# Altium PCB 新核心板PCB1.PcbDoc (part 3 of 3)
Units mil, origin at the board's own origin, x right, y up, seen from the top; angles counter-clockwise.
Board outline 5840.03 x 4550.03 mil, 2 copper layers (Top Layer, Bottom Layer); 116 components, 170 nets, 698 pads, 423 vias.
Unrouted connection lines stored in the file: 1.
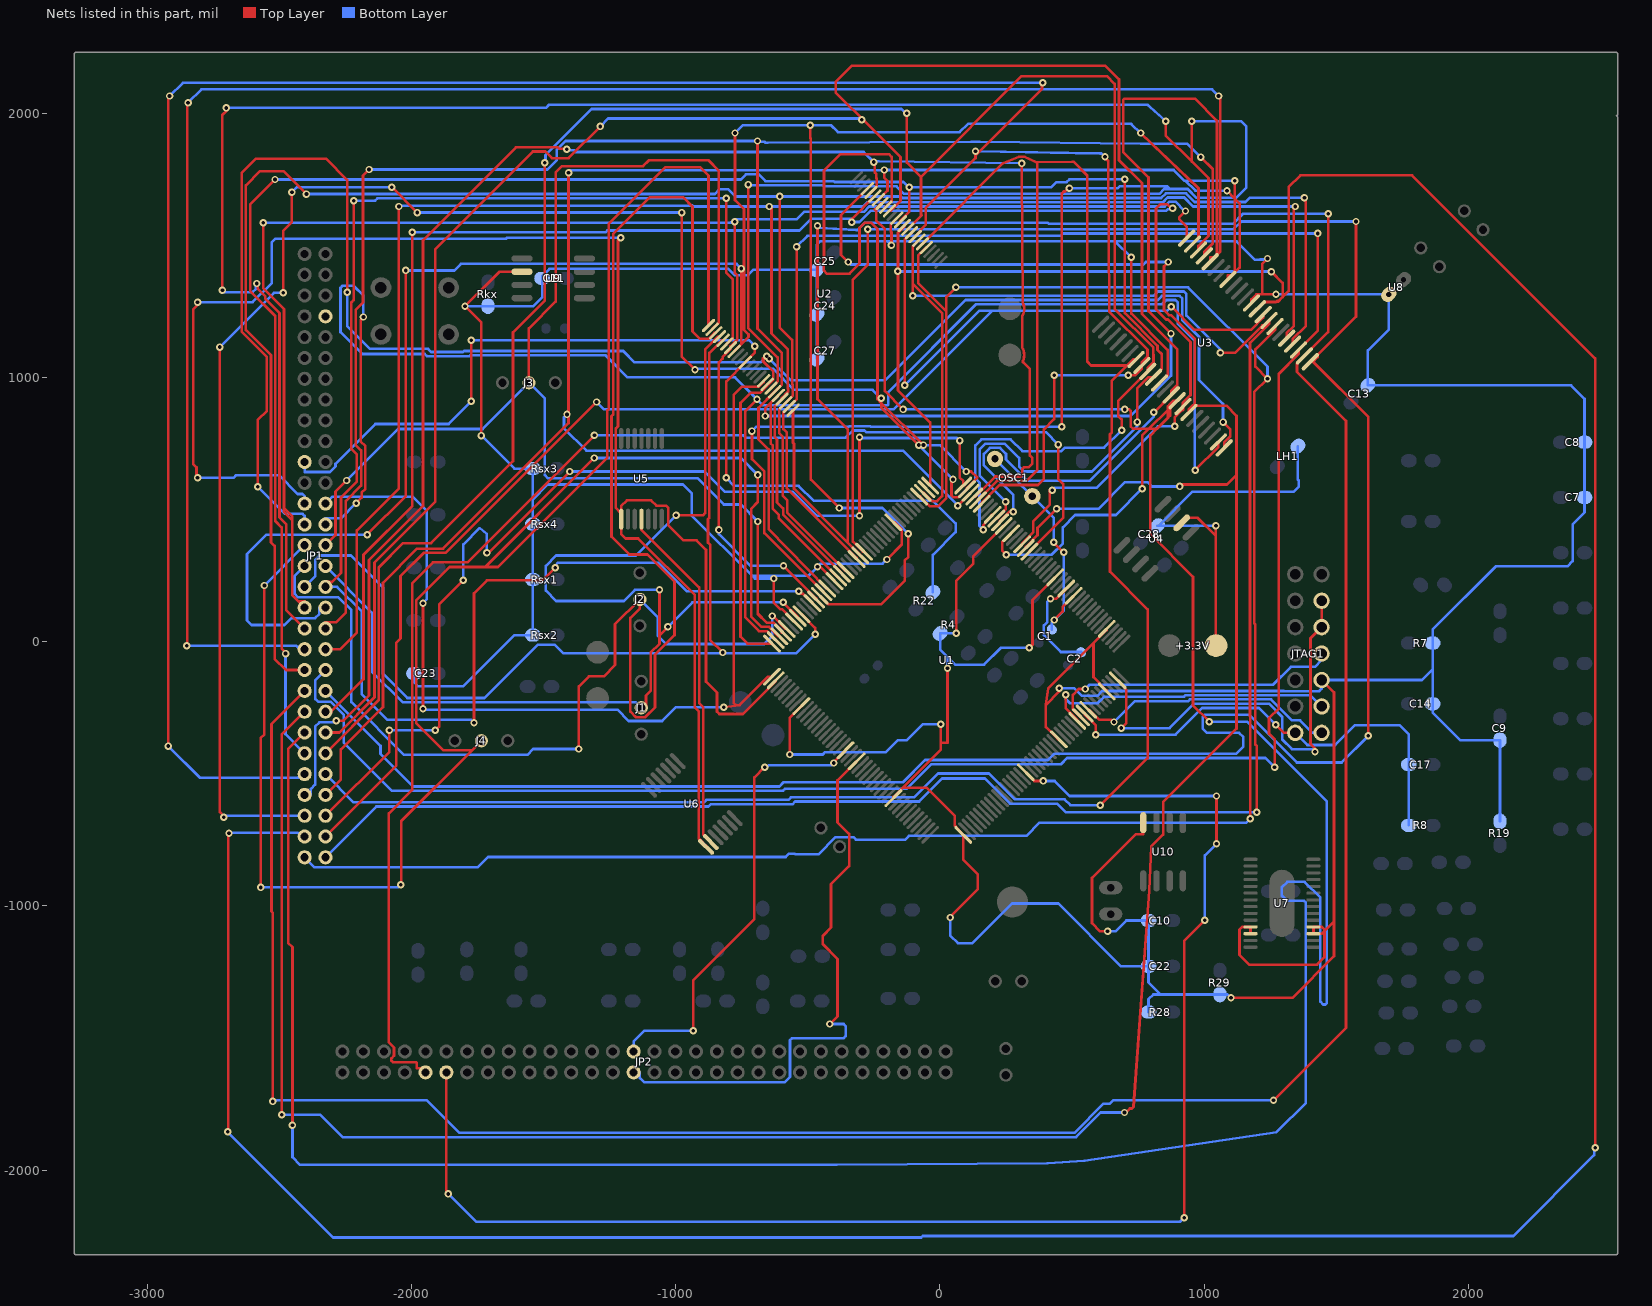
[diagram p3: the nets of this part, all layers, seen from the top]

## Via types
v1: diameter 28, hole 14, Top Layer to Bottom Layer, 422 vias
v2: diameter 50, hole 28, Top Layer to Bottom Layer, 1 vias

## Nets (pads, with @x,y where several pads share a name; then routed paths per layer and width w, separated by ;. In a path a pad name is that pad's centre, name@x,y a point inside that pad or via, vN(x,y) a via of type N, cw(c..) or ccw(c..) an arc to the next point about the centre after c; other vN are vias at no path point) (continued)
TCK: JTAG1.9 JTAG1.11 U1.87 | length 1692.7
  Top Layer w10: U1.87@673.39,-146.5 675.47,-146.5 705,-182.04 705,-309 v1(687,-327) ; v1(1420,-416) 1420,-404 1403,-387 1403,13 JTAG1.9@1445,55 JTAG1.11@1445,155
  Bottom Layer w10: v1(687,-327) 869.21,-327 961.71,-234.5 1245.93,-234.5 1296,-284.58 1296,-370 1333,-407 1411,-407 v1(1420,-416)
TDI: JTAG1.3 U1.76 | length 1137.4
  Top Layer w10: v1(477,-201) 477,-252.41 520.28,-295.69 U1.76@520.28,-299.61
  Bottom Layer w10: v1(477,-201) 477,-217 493,-233 596.81,-233 620.81,-209 923.21,-209 929.71,-202.5 1277.7,-202.5 1278.2,-203 1403,-203 JTAG1.3@1445,-245
TDO: JTAG1.7 U1.77 | length 1119.1
  Top Layer w10: U1.77@534.19,-285.7 532.91,-285.7 503.37,-256.15 503.37,-201 525.37,-179 v1(550,-179)
  Bottom Layer w10: v1(550,-179) 566,-163 1261,-163 1329,-95 1420,-95 1445,-70 JTAG1.7@1445,-45
TMS: JTAG1.1 U1.79 | length 990
  Top Layer w10: U1.79@562.03,-257.86 565.96,-257.86 603.79,-295.69 650.93,-295.69 v1(659.35,-304.11)
  Bottom Layer w10: v1(659.35,-304.11) 737.46,-226 938.5,-226 946,-218.5 1253.5,-218.5 1333,-298 1364,-298 1411,-345 JTAG1.1@1445,-345
TRST*: C17.1 JTAG1.2 R8.1 U1.78 | length 1772
  Top Layer w10: U1.78@548.11,-271.78 548.11,-275.7 590.41,-318 v1(590.41,-352) ; v1(1271,-314) 1302,-345 JTAG1.2@1345,-345
  Bottom Layer w10: v1(590.41,-352) 892,-352 993,-251 1208,-251 v1(1271,-314) ; JTAG1.2@1345,-345 1391,-391 1496,-391 1571,-316 1740,-316 1775,-351 C17.1@1775,-465.24 R8.1@1775,-695.28
TXDB: JP2.50 U1.62 | length 5703.9
  Top Layer w10: JP2.50@-1867.36,-1630 -1868,-1630 -1868,-2077.13 -1860,-2085.13 v1(-1860,-2090) ; U1.62@325.4,-494.49 357.92,-527 v1(392,-527) ; v1(925,-2180) 925,-1132 v1(1003,-1054) ; v1(1047,-765) v1(1047,-584)
  Bottom Layer w10: v1(-1860,-2090) -1755,-2195 910,-2195 v1(925,-2180) ; v1(392,-527) 434.37,-527 491.37,-584 v1(1047,-584) ; v1(1003,-1054) 1003,-809 v1(1047,-765)
TXDC: JP2.52 U1.114 | length 5204
  Top Layer w10: JP2.52@-1946.1,-1630 -1946.1,-1615 -1979.51,-1615 -1979.51,-1593.9 -1982.41,-1591 -2069.9,-1591 -2075.76,-1585.14 -2075.76,-1576.86 -2065.81,-1566.91 -2065.81,-1535.61 -2085,-1516.42 -2085,-650 -1997,-562 -1997,221 -1918,300 -1788,300 v1(-1307,781) ; U1.114@339.32,340.68 467,468.36 467,596.82 448,615.82 v1(448,746)
  Bottom Layer w10: v1(-1307,781) -745,781 -736,772 -356,772 -329,799 -285,799 -279,793 401,793 v1(448,746)
TZ1N: JP2.31 U1.21 | length 1725.4
  Top Layer w10: v1(-933,-1473) -933,-1281 -702,-1050 -702,-514 v1(-663,-475) ; v1(-401,-459) -401,-455.32 U1.21@-356.65,-410.97
  Bottom Layer w10: JP2.31@-1158.7,-1551.26 -1158.7,-1513 -1118.7,-1473 v1(-933,-1473) ; v1(-663,-475) -654.7,-475 -647.7,-468 -410,-468 v1(-401,-459)
TZ2N: JP2.32 U1.24 | length 2205
  Top Layer w10: v1(-416,-1447) -387,-1418 -387,-1201 -443,-1145 -443,-1113 -411.76,-1081.76 -411.76,-917.76 -343,-849 -343,-727.86 -387,-683.86 -387,-524.84 U1.24@-314.89,-452.73
  Bottom Layer w10: JP2.32@-1158.7,-1630 -1135,-1630 -1135,-1651 -1118,-1668 -588,-1668 -567,-1647 -567,-1508 -560,-1501 -364,-1501 -356,-1493 -356,-1455 -364,-1447 v1(-416,-1447)
VCC: C7.1 C8.1 C9.1 C10.1 C11.1 C13.1 C14.1 C22.1 C23.1 C24.1 C25.1 C27.1 JTAG1.5 R4.1 R7.2 R19.1 R28.1 R29.1 Rkx.1 Rsx1.2 Rsx2.2 Rsx3.2 Rsx4.2 U1.9 U1.34 U1.45 U1.71 U1.84 U1.93 U1.107 U1.121 U1.143 U1.159 U1.170 U2.37 U3.11 U3.33 U7.11 U7.12 U7.17 U7.18 U8.1 U9.2 U10.8 | length 23386.8
  Top Layer w10: v1(-1735,780) -1735,1208 v1(-1797,1270) -1667,1400 U9.2@-1581.22,1400 ; v1(-628,239) -628,146.76 -604,122.76 -598.07,122.76 U1.170@-551.52,76.21 ; v1(-568,-427) -568,-288.26 U1.9@-523.68,-243.94 ; v1(-463,283) -452.08,283 U1.159@-398.41,229.32 ; v1(-200.15,311) -144,367.15 -144,424.26 -171.77,452.03 U1.143@-175.7,452.03 ; v1(-183,1500) -183,1550 -186,1553 -186,1579.68 U2.37@-162.84,1602.84 ; U1.34@-175.7,-591.92 -175.7,-588 -140.7,-553 ; v1(4,-312.4) 4,-383.16 ; v1(29.14,-101) 29.14,-383.16 4,-383.16 ; v1(40,-1044) 40,-1040 144,-936 144,-881 88.77,-825.77 U1.45@88.77,-731.12 87.87,-731.12 57,-695.41 57,-659 -49,-553 -140.7,-553 ; v1(62,31.36) 62,230.18 126.82,295 126.82,323.63 241.3,438.11 U1.121@241.89,438.11 ; v1(339,-23) 351,-11 351,157.48 U1.107@436.76,243.24 ; U1.71@450.68,-369.21 446.75,-369.21 401,-323.46 401,-240 ; v1(452,-176) 452,-189 401,-240 ; U1.84@631.63,-188.26 631.63,-184.33 581.77,-134.47 581.77,-5.42 ; U1.93@631.63,48.37 631.63,44.44 581.77,-5.42 ; v1(635,-1096) 607.05,-1096 576.05,-1065 576.05,-894.01 741.06,-729 770,-729 U10.8@770,-685 ; v1(725,1455) 725,1241.26 862,1104.26 862,1009.29 U3.33@831.36,978.64 ; v1(1102,-1348) 1334,-1348 1492,-1190 1492,-1059.16 ; U7.12@1176,-1105.16 U7.11@1176,-1079.57 1143.43,-1079.57 1134,-1089 1134,-1185 1171,-1222 1428,-1222 1456,-1194 1456,-1095.16 ; U3.11@1179.34,1282.09 1179.34,1295.34 1198.32,1314.32 1220.25,1314.32 ; v1(1240,1450) 1240,1448.48 1220.25,1428.73 1220.25,1314.32 ; v1(1272.32,1314.32) 1220.25,1314.32 ; JTAG1.5@1445,-145 1492,-192 1492,-1059.16 ; -140.7,-553 4,-408.3 4,-383.16 ; 401,-240 411,-176.19 581.77,-5.42 ; 1456,-1095.16 1492,-1059.16 ; 1456,-1095.16 1446,-1105.16 U7.17@1414,-1105.16 U7.18@1414,-1079.57 1446.57,-1079.57 1456,-1089 1456,-1095.16
  Bottom Layer w10: C23.1@-1990,-120.28 -1990,-153 -1974,-169 -1804,-169 -1610.21,24.79 Rsx2.2@-1540,24.79 Rsx1.2@-1540,234.86 Rsx4.2@-1540,444.93 -1540,539 ; v1(-1797,1270) Rkx.1@-1710,1270 -1538,1270 -1505,1303 C11.1@-1505,1375 -1505,1383.49 -1477.49,1411 -800,1411 -776,1387 -726,1387 -704.76,1408.24 C25.1@-464.8,1408.24 ; v1(-1735,780) -1610,655 Rsx3.2@-1540,655 -1540,539 ; v1(-628,239) -700,239 -711,250 ; v1(-568,-427) -443,-427 -434,-418 -204,-418 -159.69,-373.69 -125.69,-373.69 -64.4,-312.4 v1(4,-312.4) ; C27.1@-464.8,1069.8 C24.1@-464.8,1239.02 C25.1@-464.8,1408.24 ; v1(-200.15,311) -216.15,295 -451,295 v1(-463,283) -496,250 -711,250 ; v1(-183,1500) -198.33,1515.33 ; v1(29.14,-101) 29.14,-58.14 ; v1(40,-1044) 40,-1113 68,-1141 123,-1141 273,-991 448.72,-991 686.34,-1228.62 C22.1@790,-1228.62 ; v1(62,31.36) R4.1@1.36,31.36 1.36,-30.36 29.14,-58.14 ; v1(339,-23) 231,-23 167,-87 58,-87 29.14,-58.14 ; v1(452,-176) 508.62,-176 537.62,-205 596,-205 614.5,-186.5 1301.7,-186.5 1302.2,-187 1436,-187 1445,-178 JTAG1.5@1445,-145 1825,-145 1865,-105 ; v1(635,-1096) 665,-1096 705.72,-1055.28 C10.1@790,-1055.28 C22.1@790,-1228.62 ; v1(725,1455) 723.33,1455 663,1515.33 ; R28.1@790,-1401.95 790,-1353 808,-1335 836,-1335 ; v1(1102,-1348) 1089,-1335 R29.1@1060,-1335 836,-1335 ; v1(1240,1450) 1236.56,1446.56 1211.69,1446.56 1210.13,1445 1193,1445 1122.67,1515.33 663,1515.33 ; v1(1272.32,1314.32) U8.1@1699.32,1314.32 1699.32,1181.52 1619.8,1102 C13.1@1619.8,970.2 2388.8,970.2 2440,919 C8.1@2440,755 C7.1@2440,545.71 2440,489 2395,444 2395,305 2375,285 2104,285 1865,46 R7.2@1865,-5.14 1865,-105 ; R19.1@2120,-680 C9.1@2120,-372.5 1969.5,-372.5 1865,-268 C14.1@1865,-235.19 1865,-105 ; -1540,539 -1484,595 -972,595 -939,562 -939,478 -711,250 ; C25.1@-464.8,1408.24 -464.8,1503.2 -452.67,1515.33 -198.33,1515.33 ; -198.33,1515.33 -183,1515.33 663,1515.33 ; C22.1@790,-1228.62 790,-1289 836,-1335
VDD: +3.3V.A C28.1 LH1.1 U4.2 | length 1578.5
  Top Layer w10: U4.2@915.36,449.64 934.71,469 976,469 1045,400 ; +3.3V.A@1045,-5 1045,400 ; v1(1045,438.64) 1045,400
  Bottom Layer w10: C28.1@823.64,438.64 C28.1@827,438.64 ; v1(1045,438.64) C28.1@827,438.64 ; LH1.1@1355,740 1355,614 1358,611 1358,586 1339,567 955.36,567 C28.1@827,438.64
WR: JP1.40 R22.2 U2.11 | length 3878
  Top Layer w10: v1(-1773,910) v1(-1773,1141) ; v1(-808,620) -808,985.52 U2.11@-736.32,1057.2 -700,1093.52 v1(-700,1118)
  Bottom Layer w10: JP1.40@-2403.74,679.96 -2403.74,642 -2308.23,642 -2287.23,663 -2287.23,672.77 -2136,824 -1859,824 v1(-1773,910) ; v1(-1773,1141) -723,1141 v1(-700,1118) ; v1(-808,620) -778,590 -534,590 -477,533 -25,533 60,448 60,414.59 -26.23,328.36 R22.2@-26.23,186.69
X1: C2.2 U1.104 | length 392.5
  Top Layer w10: v1(419,162) 440.32,162 478.52,200.2 U1.104@478.52,201.48
  Bottom Layer w10: v1(419,162) 406.33,149.33 406.33,73.33 394,61 394,25 458,-39 535.06,-39 C2.2@535.06,-39.94
X2: C1.2 OSC1.1 OSC1.2 U1.102 | length 907.3
  Top Layer w10: v1(431,376) v1(469,338) ; v1(433,82) 464.84,113.84 464.84,132.12 U1.102@506.36,173.64
  Bottom Layer w10: OSC1.2@208.78,691.62 311.05,589.35 311.05,588.57 349.42,550.2 OSC1.1@350.2,550.2 431,469.4 v1(431,376) ; C1.2@424.33,46.33 v1@424.33,72.33 ; v1(433,82) 424.33,73.33 v1@424.33,72.33 ; v1(469,338) 469,117 v1@424.33,72.33
XA0: JP1.17 U1.151 U3.1 | length 9932.8
  Top Layer w10: U1.151@-287.05,340.68 -290.98,340.68 -329,378.7 -329,1370 -273,1426 v1(-273,1561) ; U3.1@1402.05,1059.38 1412.38,1059.38 ; v1(1575,1590) 1575,1230.13 1430,1085.13 1430,1077 1412.38,1059.38 ; v1(1622,-356) 1622,849.75 1412.38,1059.38
  Bottom Layer w10: JP1.17@-2325,-186.18 -2116.66,-394.52 -2116.66,-425 -1993.66,-548 -607.2,-548 -591.2,-532 -140.18,-532 -56.17,-448 409.03,-448 432.7,-424.34 1121.66,-424.34 1149,-397 1149,-361 1133,-345 1011,-345 995,-329 995,-285 1004,-276 1170,-276 1351,-457 1521,-457 v1(1622,-356) ; v1(-273,1561) 1112.01,1561 1141.01,1590 v1(1575,1590)
XA1: JP1.18 U1.152 U2.24 U3.2 | length 12964.4
  Top Layer w10: v1(-2525,-1740) -2525,-1025.28 -2529,-1021.28 -2529,-311.44 JP1.18@-2403.74,-186.18 ; U2.24@-555.37,876.25 -555.37,752 -552,748.63 -552,579.07 -349,376.07 ; v1(-463,1574) -463,918 -349,804 -349,376.07 ; U1.152@-300.97,326.76 -300.97,328.04 -349,376.07 ; v1(1263,-1736) 1537.41,-1461.59 1537.41,835.59 1352,1021 1352,1053.87 U3.2@1379.78,1081.65 1405.53,1107.4 1470,1171.87 v1(1470,1620)
  Bottom Layer w10: v1(-2525,-1740) -2521.56,-1736.56 -2510.7,-1736.56 -2510.14,-1736 -1941.47,-1736 -1818.47,-1859 509.2,-1859 619.83,-1748.37 643.81,-1748.37 656.18,-1736 v1(1263,-1736) ; v1(-463,1574) -463,1566.99 -316.3,1558.02 -315.69,1558 -311.36,1558 -283.36,1586 408.19,1586 413.19,1581 1109.39,1581 1148.39,1620 v1(1470,1620)
XA2: JP1.19 U1.153 U2.23 U3.3 | length 9441.7
  Top Layer w10: v1(-542,1495) -542,989.82 -541.1,988.93 -541.1,918.35 U2.23@-569.29,890.17 -592,867.45 -592,805.01 -578.65,791.66 -578.65,580.52 -314.89,316.77 U1.153@-314.89,312.84 ; v1(1267,-474.85) 1267,-369 1246,-348 1246,-289 1283,-252 1283,1014 1357.51,1088.51 U3.3@1357.51,1103.92 1430,1176.41 v1(1430,1545)
  Bottom Layer w10: JP1.19@-2325,-107.44 -2363,-145.44 -2363,-217 -2352.85,-227.15 -2306.66,-227.15 -2255.43,-278.38 -2255.43,-383.04 -2074.47,-564 -592.92,-564 -585.92,-557.01 -125.51,-557.01 -32.5,-464 457.75,-464 481.41,-440.34 1232.49,-440.34 v1(1267,-474.85) ; v1(-542,1495) -501,1536 457.56,1536 466.56,1545 v1(1430,1545)
XA3: JP1.20 U1.156 U2.22 U3.4 | length 8219.7
  Top Layer w10: JP1.20@-2403.74,-107.44 -2474.56,-107.44 -2517,-65 -2517,362 -2531,376 -2531,1084.61 -2626,1179.61 -2626,1727 -2572,1781 -2484,1781 v1(-2397,1694) ; v1(-606,1685) -606,1188.85 -559,1141.85 -559,974.82 -557.1,972.93 -557.1,930.19 U2.22@-583.21,904.08 -608,879.29 -608,789.01 -594.65,775.66 -594.65,552.65 -577,535 -577,487.51 -360.57,271.08 U1.156@-356.65,271.08 ; U3.4@1335.24,1126.19 1335.24,1145.43 1385,1195.19 1385,1665.14 1383.44,1666.7 1383.44,1676.56 v1(1380,1680)
  Bottom Layer w10: v1(-2397,1694) -851.15,1694 -832.85,1712.3 -801.15,1712.3 -773.85,1685 -147.63,1685 -141.63,1679 837.63,1679 855.63,1697 931.75,1697 964.75,1664 1156.5,1664 1172.5,1680 v1(1380,1680)
XA4: JP1.21 U1.157 U2.21 U3.5 | length 7599.8
  Top Layer w10: JP1.21@-2325,-28.7 -2269.7,-28.7 -2206.5,34.5 -2206.5,420.5 -2047,580 v1(-2047,1647) ; v1(-646,1647) -637,1638 -637,1167 -575,1105 -575,957 -574,956 -574,945.91 -597.13,922.79 U2.21@-597.13,918 -624,891.13 -624,773.01 -616,765.01 -616,527 -593,504 -593,480.88 -370.57,258.45 U1.157@-370.57,257.16 ; U3.5@1312.97,1148.46 1312.97,1167.7 1340,1194.73 1340,1642 v1(1345,1647)
  Bottom Layer w10: v1(-2047,1647) -2044.79,1649.21 -939.41,1649.21 -937.2,1647 v1(-646,1647) ; -937.2,1652 -932.2,1647 -651,1647 -646,1652 -641,1647 -290.24,1647 -274.24,1663 844.25,1663 862.25,1681 925.12,1681 959.12,1647 v1(1345,1647)
XA5: JP1.22 U1.158 U2.20 U3.18 | length 11598
  Top Layer w10: v1(-2850,-15) -2847.5,-12.5 -2847.5,2037.5 v1(-2845,2040) ; v1(-661,854) -661,881.97 -640,902.97 ; U2.20@-611.04,931.92 -640,902.97 ; U1.158@-384.49,243.24 -385.51,243.24 -609,466.74 -609,480 -632,503 -632,742 -640,750 -640,902.97 ; v1(875,1166) 790,1251 790,1757 694,1853 694,2049.14 699.86,2055 965,2055 1049,1971 U3.18@1049,1464 ; U3.18@1039,1454 1023.44,1454 U3.18@1023.44,1437.99 1039.23,1453.77 1049.23,1463.77 1062,1476.54 1062,2053.13 1055,2060.13 v1(1055,2065)
  Bottom Layer w10: v1(-2850,-15) -2436.37,-15 -2431,-20.37 -2412.07,-20.37 JP1.22@-2403.74,-28.7 ; v1(-2845,2040) -2795,2090 1030,2090 v1(1055,2065) ; v1(-661,854) 722,854 875,1007 v1(875,1166)
XA6: JP1.23 U1.161 U2.19 U3.19 | length 7366.7
  Top Layer w10: JP1.23@-2325,50.04 -2325,74 -2284,74 -2248,110 -2248,532.84 -2190,590.84 -2190,724 -2211,745 -2211,1256 -2183,1284 -2183,1764 v1(-2160,1787) ; v1(-690,1895) -690,1184.5 -597.87,1092.37 -597.87,972.94 U2.19@-624.96,945.84 -686,884.81 -686,766 -648,728 -648,427.17 -428.32,201.48 U1.161@-426.24,201.48 ; v1(987,1834) 1033,1788 1033,1507.83 1001.17,1476 U3.19@1001.17,1460.26
  Bottom Layer w10: v1(-2160,1787) -1484.64,1787 -1450.18,1821.47 -1450.18,1860.53 -1415.71,1895 v1(-690,1895) -686.56,1891.56 -663.56,1891.56 -659.93,1887.93 -651.64,1887.93 120.09,1892 149.85,1892 cw(c149.85,1882) 150.02,1892 760.03,1884.71 760.22,1884.71 ccw(c760,1896.81) 762.66,1885 936,1885 938.93,1882.07 943.93,1877.07 v1(987,1834)
XA7: JP1.24 U1.162 U2.18 U3.20 | length 12961.9
  Top Layer w10: v1@-2715,1328.53 -2715,1994.18 -2700,2009.18 v1(-2700,2020) ; v1(-2585,1355.42) -2581.56,1351.98 -2581.56,1335.93 -2553,1307.37 -2553,1298 -2499,1244 -2499,470 -2473.51,444.51 -2473.51,119.81 JP1.24@-2403.74,50.04 ; v1(-725,1730) -725,1186.87 -613.87,1075.74 -613.87,985.2 -638.88,960.19 U2.18@-638.88,959.76 ; v1(-711,797) -711,691 -664,644 -664,411.4 U1.162@-440.16,187.56 ; v1(462,813) 462,1696.87 469.07,1703.94 473.28,1703.94 485.71,1716.37 v1(490.58,1716.37) ; v1(855,1970) 855,1916 953.54,1817.46 ; v1(953.54,1970) 953.54,1817.46 ; U3.20@978.9,1482.53 978.9,1498 1017,1536.1 1017,1754 953.54,1817.46
  Bottom Layer w10: v1@-2715,1328.53 -2709.14,1322.67 -2600.33,1322.67 -2588.44,1334.56 -2588.44,1351.98 v1(-2585,1355.42) ; v1(-2700,2020) -1490.3,2020 -1478.3,2032 786.93,2032 793.22,2025.7 793.6,2025.35 796.26,2022.95 v1(855,1970) ; v1(-725,1730) -722,1727 -442.06,1727 -438.46,1723.4 -163.4,1723.4 -135,1695 831,1695 849,1713 871,1713 ; v1(-711,797) -695,813 -345,813 -343,815 -263,815 -261,813 v1(462,813) ; v1(490.58,1716.37) 673.91,1716.37 681.54,1724 860,1724 871,1713 ; v1(953.54,1970) 1140,1970 1160,1950 1160,1719 1121,1680 971.37,1680 938.37,1713 871,1713
  other v1: -2715,1330
XA8: JP1.25 U1.163 U2.8 U3.21 | length 9044.8
  Top Layer w10: v1(-2167,405) -2021,551 v1(-2021,1405) ; U2.8@-778.08,1098.96 -751,1126.03 ; v1(-775,1925) -775,1671.1 -741,1637.1 -741,1412 -741,1180.24 -724,1163.24 -724,1153.03 -751,1126.03 ; v1(-751,1412) -751,1126.03 ; v1(-490,1955) -490,1905.92 -488,1903.92 -488,614 v1(-380,506) ; U1.163@-454.08,173.65 -422.44,142 -221,142 -133,230 -133,307 -119,321 v1(-119,408) ; v1(760,1925) 979,1716 979,1527.17 U3.21@956.63,1504.8
  Bottom Layer w10: JP1.25@-2325,128.78 -2348,128.78 -2348,105 -2364,89 -2454,89 -2480,63 -2604,63 -2622,81 -2622,331 -2548,405 v1(-2167,405) ; v1(-2021,1405) -1837,1405 -1812,1430 -769,1430 v1(-751,1412) ; v1(-775,1925) -746,1954 -491,1954 v1(-490,1955) -412.73,1955 -385.73,1928 75.17,1928 107.17,1960 723.34,1960 726.24,1957.23 v1(760,1925) ; v1(-380,506) -217,506 v1(-119,408)
XA9: JP1.26 U1.164 U2.7 U3.22 | length 7023.8
  Top Layer w10: v1(-2560,1585) -2560,1337 -2482,1259 -2482,506 ; -2451,176 -2427,152 ; v1(-836,423) -836,1057.04 -822,1071.04 -822,1078.09 -792,1108.09 U2.7@-792,1112.88 -792,1117.66 -767,1142.66 -767,1387 -776,1396 v1(-776,1589) ; v1(-591.35,287) -468,163.65 U1.164@-468,159.73 ; v1(930,1630) 906.64,1606.64 906.64,1598.36 934.36,1570.64 U3.22@934.36,1527.07 ; -2482,506 -2482,491 -2451,460 ; -2482,506 -2451,475 -2451,460 ; -2451,460 -2451,176.04 -2426.96,152 ; -2426.96,152 JP1.26@-2403.74,128.78 -2403.74,152 -2426.96,152
  Bottom Layer w10: v1(-2560,1585) -790,1585 -776,1599 -541.15,1599 -513.15,1627 -287.61,1627 -267.61,1647 850.88,1647 868.88,1665 891.36,1665 926.36,1630 v1(930,1630) ; v1(-836,423) -836,407 -716,287 v1(-591.35,287) ; -790,1587 -778,1587 v1(-776,1589)
XA10: JP1.27 U1.165 U2.6 | length 6368.8
  Top Layer w10: JP1.27@-2325,207.52 -2325,226 -2300,226 -2266,260 -2266,546 -2206,606 -2206,708 -2227,729 -2227,1284 -2218,1293 v1(-2218,1669) ; v1(-1763,-307) -1763,183 -1714,232 -1503,232 v1(-1455,280) ; v1(-808,1677.93) -808,1396 -783,1371 -783,1149.71 U2.6@-805.92,1126.79 ; v1(-534,191) -524,181 -517.12,181 U1.165@-481.92,145.81
  Bottom Layer w10: JP1.27@-2325,207.52 -2280.52,207.52 -2187,114 -2187,-199 -2090.08,-295.92 -1774.08,-295.92 v1(-1763,-307) ; v1(-2218,1669) -2137,1669 -2128.07,1677.93 v1(-808,1677.93) ; v1(-1455,280) -1455,289 -1445,299 -1066,299 -958,191 v1(-534,191)
XA11: JP1.28 U1.168 U2.5 | length 3891.3
  Top Layer w10: v1(-821,-41) -869,7 -869,367 -877,375 -877,464 -872,469 -872,1093.33 -824.62,1140.71 U2.5@-819.84,1140.71 ; U1.168@-523.68,104.05 -471.63,52 v1(-471.63,28)
  Bottom Layer w10: JP1.28@-2403.74,207.52 -2364,247.26 -2364,310 -2348,326 -2229,326 -2107.25,204.25 -2107.25,-120.94 -2015.19,-213 -1723,-213 -1522,-12 -1457,-12 -1425,-44 v1@-824,-44 ; v1(-821,-41) v1@-824,-44 ; v1(-471.63,28) -543.63,-44 v1@-824,-44
XA12: J1.2 JP1.29 U1.169 U2.4 | length 4571.2
  Top Layer w10: J1.2@-1130,-250 -1112,-250 -1112,-204 -1094,-186 -1094,-41 -1061,-8 -1061,24 ; v1(-1061,196) -1061,24 ; v1(-1029,56) -1061,24 ; v1(-998,478) -897,478 -888,487 -888,1105.17 -838.54,1154.63 U2.4@-833.75,1154.63 ; v1(-592.54,149) -537.6,94.06 U1.169@-537.6,90.13
  Bottom Layer w10: JP1.29@-2325,286.26 -2148,109.26 -2148,-114 -2033,-229 -1151,-229 J1.2@-1130,-250 ; v1(-1061,196) -1154,196 -1196,154 -1452,154 -1491,193 -1491,287 -1452,326 -1150,326 v1(-998,478) ; v1(-1029,56) -936,149 v1(-592.54,149)
XA13: J2.2 JP1.30 U1.172 U2.3 | length 6606.3
  Top Layer w10: v1(-1366,-406) -1366,-169 -1327.9,-130.9 -1271.66,-130.9 -1229,-88.24 -1229,66 J2.2@-1135,160 -1135,126 -1171,90 -1171,-265 -1150,-286 -1115,-286 -1078,-249 -1078,-49 -1004,25 -1004,228 -1106,330 -1175,330 -1242.2,397.2 -1242.2,854.28 -1236.48,860 -1236.48,1543 -1097.48,1682 -972,1682 -936,1646 -936,1174 -908,1146 -875.01,1146 -852.46,1168.55 U2.3@-847.67,1168.55 ; v1(-634,97) -631.91,97 -583.28,48.37 U1.172@-579.36,48.37
  Bottom Layer w10: JP1.30@-2403.74,286.26 -2442,248 -2442,182 -2428,168 -2276,168 -2227,119 -2227,-229 -2028,-428 -1561,-428 -1539,-406 v1(-1366,-406) ; J2.2@-1135,160 -1068,93 -1068,23 -1036,-9 -665,-9 -634,22 v1(-634,97)
XA14: J3.2 JP1.31 U1.173 U2.2 | length 4953.8
  Top Layer w10: JP1.31@-2325,365 -2287,403 -2287,568 v1(-2245,610) ; J3.2@-1555,980 -1555,1186 -1454,1287 -1454,1775.73 -1430,1799.73 -1123.27,1799.73 -1101,1822 -876,1822 -836,1782 -836,1208.07 U2.2@-861.59,1182.47 ; v1(-689,455) -689,105.7 -655.3,72 -629.54,72 -597.2,39.66 -597.2,34.45 U1.173@-593.28,34.45
  Bottom Layer w10: v1(-2245,610) -2050,805 -1730,805 J3.2@-1555,980 -1495,920 -1495,630 -1484,619 -917,619 -817.13,519.13 -753.13,519.13 v1(-689,455)
XA15: J4.2 JP1.32 U1.174 U2.1 | length 8082.6
  Top Layer w10: v1(-2570,-930) -2570,-364.38 -2556,-350.38 v1(-2556,212.74) ; v1@-2038.18,-920.36 -2038.18,-678.18 -1771,-411 ; J4.2@-1735,-375 -1771,-411 ; v1(-1308.03,695) -1720.24,282.79 ; U2.1@-875.51,1196.39 -875.51,1763.51 -908,1796 -1038.34,1796 -1252.48,1581.86 -1252.48,881.22 -1258.2,875.5 -1258.2,696.89 -1672.31,282.79 -1720.24,282.79 ; v1(-689,631) -689,528 -714,503 -714,95 -675,56 -646.59,56 -611.12,20.53 U1.174@-607.2,20.53 ; -1771,-411 -1879,-411 -1981,-309 -1981,156.97 -1855.18,282.79 -1720.24,282.79
  Bottom Layer w10: v1(-2570,-930) -2050.91,-930 v1@-2038.18,-917.27 ; v1(-2556,212.74) JP1.32@-2403.74,365 ; v1(-1308.03,695) -753,695 v1(-689,631)
  other v1: -2040,-920
XA16: JP1.33 U1.175 U3.43 | length 6530.8
  Top Layer w10: v1(-2209,524) -2188,545 -2188,564 -2174,578 -2174,740 -2192.11,758.11 -2192.11,1217.89 v1(-2181.37,1228.63) ; v1@-691.5,917.5 v1(-692,917) -736,873 -736,92 -684,40 -654.5,40 U1.175@-621.12,6.61 ; v1(966.37,649) 1054.07,736.7 U3.43@1054.07,755.93
  Bottom Layer w10: JP1.33@-2325,443.74 -2325,467 -2266,467 v1(-2209,524) ; v1(-2181.37,1228.63) -2181.37,1310.37 -2218,1347 -2260,1347 -2268,1339 -2268,1171.45 -2185.06,1088.51 -1949.51,1088.51 -1941.46,1080.46 -1780.26,1080.46 -1776.72,1084 -1265.8,1084 -1182.33,1000.53 -774.53,1000.53 v1@-691.5,917.5 ; v1(-692,917) -670.21,895.21 -196.94,895.21 -195.75,896.4 -195.75,943.89 137.36,1277 841,1277 857,1293 892,1293 901,1284 901,1202.61 965,1138.61 965,650.37 v1(966.37,649)
XA17: JP1.34 U1.176 U2.17 U3.44 | length 7866.8
  Top Layer w10: v1(-2581,586) -2581,839.92 -2547,873.92 -2547,1077.99 -2642,1172.99 -2642,1774 -2588,1828 -2323,1828 -2243,1748 v1(-2243,1322) ; v1(-655,1080) -661.18,1080 -670.18,1071 -670.18,1063.18 ; v1(-646,1071) -662.36,1071 -670.18,1063.18 ; U1.176@-635.04,-7.31 -727.69,-7.31 -754,19 -754,904 -716,942 -679.7,942 -652.8,968.9 U2.17@-652.8,973.68 -648.02,973.68 -629.87,991.83 -629.87,1022.87 -670.18,1063.18 ; v1(1072,831) 1099,804 1099,775.56 1076.34,752.9 U3.44@1076.34,733.66
  Bottom Layer w10: v1(-2581,586) -2479,484 -2412,484 -2403.74,475.74 JP1.34@-2403.74,443.74 ; v1(-2243,1322) -2243,1194 -2157,1108 -1937,1108 -1925.46,1096.46 -1804.26,1096.46 -1800.72,1100 -1198,1100 -1155,1057 -678,1057 v1(-655,1080) ; v1(-646,1071) -564,989 -207,989 97,1293 825,1293 841,1309 908,1309 917,1300 917,1218 981,1154 981,991 1072,900 v1(1072,831)
XA18: JP1.35 U1.1 U2.16 | length 3908.2
  Top Layer w10: v1(-1956,-254) v1(-1956,146) ; v1(-818,-248) -757.37,-240 ; U2.16@-666.72,987.6 -666.72,982.82 -684.54,965 -748,965 -780,933 -780,-232 -772,-240 -757.37,-240 ; U1.1@-635.04,-132.58 -649.95,-132.58 -757.37,-240
  Bottom Layer w10: JP1.35@-2325,522.48 -2298.48,549 -1996,549 -1941,494 -1941,161 v1(-1956,146) ; v1(-1956,-254) -1952.5,-257.5 -1220.5,-257.5 -1178,-300 -1051,-300 -999,-248 v1(-818,-248)
XA19: JP1.36 U1.2 U5.1 U6.1 | length 6810.7
  Top Layer w10: v1(-2809,620) -2812.98,623.98 -2812.98,660 -2826,673.02 -2826,1257.18 -2809,1274.18 v1(-2809,1285) ; v1(-1207,1529.14) -1207.83,1529.14 -1217.96,1519 -1217.96,815.31 -1226.2,807.07 -1226.2,506.49 U5.1@-1205.72,486 ; U6.1@-884.73,-776.23 -884.73,-772.56 -911.62,-745.67 -911.62,-264.21 -927,-248.82 -927,176 -1141.72,390.72 -1189.44,390.72 -1205.72,407 U5.1@-1205.72,463.79 U5.1@-1205.72,486 ; U1.2@-621.12,-146.5 -621.12,-150.43 -744.54,-273.85 -834.45,-273.85 -843.31,-265 -843.31,-192.69 -885,-151 -885,347.62 -921.01,383.64 -970.64,383.64 -1028,441 -1028,507 -1036,515 -1073,515 -1093,535 -1183.72,535 -1205.72,513 U5.1@-1205.72,486
  Bottom Layer w10: v1(-2809,620) -2672.59,620 -2662.59,630 -2501,630 -2430,559 -2411.74,559 -2403.74,551 JP1.36@-2403.74,522.48 ; v1(-2809,1285) -2600.25,1285 -2528,1357.25 -2528,1512 -2514.86,1525.14 -2078.32,1525.14 -2078.18,1525 -1641.63,1525 -1637.5,1529.14 v1(-1207,1529.14)
XB19: U5.4 U6.2 | length 1330.6
  Top Layer w10: U5.4@-1128.95,463.79 -1128.95,423 -911,205.05 -911,-232.82 -895,-248.82 -895,-729.76 U6.2@-866.63,-758.13
XCLKOUT: JP1.53
XD0: JP1.1 U1.136 U2.29 U3.7 | length 8205.8
  Top Layer w10: U1.136@-78.26,549.47 -74.33,549.47 -36.86,512 -6,512 25,543 25,1250 ; U2.29@-51.48,1491.48 -81.7,1461.27 -81.7,1356.7 25,1250 ; v1(61,1341) 25,1305 25,1250 ; v1(1200,-645) 1200,-395.63 1194,-389.63 1194,65.64 1190,69.64 1190,945 v1(1240,995) 1194,1041 1194,1105.61 1200,1111.61 1268.43,1180.04 U3.7@1268.43,1193
  Bottom Layer w10: JP1.1@-2325,-816.1 -2132.62,-623.72 -875.49,-623.72 -867.27,-615.5 -557.65,-615.5 -547.16,-605.01 -78,-605.01 9,-518 170.48,-518 265.32,-612.84 444.06,-612.84 476.21,-645 v1(1200,-645) ; v1(61,1341) 940,1341 1240,1041 v1(1240,995)
XD1: JP1.2 U1.135 U2.31 U3.8 | length 8302.2
  Top Layer w10: v1(-102,1309) -102,1354 ; U2.31@-79.32,1519.32 -102,1496.64 -102,1354 ; U1.135@-64.34,563.39 -60.41,563.39 -29.02,532 -10,532 9,551 9,1243 -102,1354 ; v1(1062,1093) 1117,1093 1221,1197 1227.88,1197 1240,1197 ; v1(1175,-670) 1175,-282.85 1174,-281.85 1174,1131 1240,1197 ; U3.8@1246.16,1215.27 1246.16,1203.16 1240,1197
  Bottom Layer w10: JP1.2@-2403.74,-816.1 -2365.84,-854 -1749,-854 -1710,-815 -583.36,-815 -570.36,-802 -549.64,-802 -546.64,-805 -459.49,-805 -394.21,-739.72 -327.28,-739.72 -318,-749 -130.58,-749 -116.58,-735 328,-735 378,-685 1160,-685 v1(1175,-670) ; v1(-102,1309) 809,1309 825,1325 924,1325 933,1316 933,1234 1062,1105 v1(1062,1093)
XD2: JP1.3 U1.134 U2.33 U3.9 | length 5915.1
  Top Layer w10: JP1.3@-2325,-737.36 -2057,-469.36 -2057,-4 -2041,12 -2041,248 -1953,336 -1869.91,336 v1(-1299,906.91) ; v1(-133,970) -133,1521.32 U2.33@-107.16,1547.16 ; v1(876,1268) 964,1180 1177.88,1180 1223.88,1226 U3.9@1223.88,1237.55
  Bottom Layer w10: v1(-1299,906.91) -1271.3,879.21 -175.79,879.21 197,1252 ; v1(-133,970) 149,1252 197,1252 ; v1(876,1268) 860,1252 197,1252
XD3: JP1.4 U1.133 U2.35 U3.10 | length 14514.9
  Top Layer w10: v1@-2693.3,-1857.7 v1@-2693.3,-729.16 ; v1(-159,1402) v1@-158,1402 ; U2.35@-135,1575 -135,1570.22 -158,1547.22 v1@-158,1402 ; U1.133@-36.5,591.23 -36.5,829.8 -158,951.3 v1@-158,1402 ; U3.10@1201.61,1259.82 1203.36,1259.82 1229.11,1285.57 1272.46,1285.57 1276.22,1289.32 ; v1(1255,1400) 1297.32,1357.68 1297.32,1303.97 1282.68,1289.32 1276.22,1289.32 ; v1(2480,-1915) 2480,1072 1787,1765 1365,1765 1320,1720 1320,1326.46 1297.41,1303.87 1279.54,1286 1276.22,1289.32
  Bottom Layer w10: v1@-2693.3,-1857.7 -2296,-2255 -70.5,-2255 -64.5,-2249 2171,-2249 2476.56,-1943.44 2476.56,-1918.44 v1(2480,-1915) ; v1@-2693.3,-729.16 -2687.44,-723.3 -2429.58,-723.3 -2415.52,-737.36 JP1.4@-2403.74,-737.36 ; v1(-159,1402) -158,1401 1254,1401 v1(1255,1400)
  other v1: -2695,-1855 -2690,-725
XD4: JP1.5 U1.132 | length 4002.4
  Top Layer w10: JP1.5@-2325,-658.62 -2083,-416.62 v1(-2083,-335) ; v1(-1909,-335) -1895,-321 -1895,141 v1(-1803,233) ; v1(-1714,336) -1708,336 v1(-1400,644) ; v1(-304,477) v1(-304,774) ; v1(75,761) 75,621.77 88.77,608 U1.132@88.77,591.23
  Bottom Layer w10: v1(-2083,-335) v1(-1909,-335) ; v1(-1803,233) -1803,368 -1741.12,429.88 -1714,407 v1(-1714,336) ; v1(-1400,644) -890,644 -813,567 -556,567 -466,477 v1(-304,477) ; v1(-304,774) -301,771 65,771 v1(75,761)
XD5: JP1.6 U1.131 U2.40 | length 8707.4
  Top Layer w10: v1(-2725,1115) -2725,-645.13 -2710,-660.13 v1(-2710,-665) ; v1(-2485,1320) -2485,1555 -2452,1588 v1(-2452,1701) ; v1(-2074,1720) v1(-1978,1624) ; v1(-977,1624) -977,1080 v1(-926.5,1029.5) ; v1(-222,921) -222,904 ; U2.40@-204.6,1644.6 -204.6,1644.76 -182,1667.36 -182,1834.14 -192.86,1845 -376,1845 -438,1783 -438,1450 -439,1449 -439,1404 -428,1393 -342,1393 -304,1431 -304,1566 -284,1586 -261,1586 -236,1561 -236,918 -222,904 ; v1(-80,744) -222,886 -222,904 ; v1(-62,744) -222,904 ; v1(50,614) 44,608 44,554 52,546 71.38,546 U1.131@102.69,577.31 102.69,581.23 142,620.54 118.54,644 v1(100,644)
  Bottom Layer w10: v1(-2725,1115) -2520,1320 v1(-2485,1320) ; v1(-2710,-665) -2705.13,-665 -2698.75,-658.62 JP1.6@-2403.74,-658.62 ; v1(-2452,1701) -2433,1720 v1(-2074,1720) ; v1(-1978,1624) v1(-977,1624) ; v1(-926.5,1029.5) -923,1033 -632,1033 -552,953 -254,953 v1(-222,921) ; v1(-80,744) v1(50,614) ; v1(-62,744) 0,744 v1(100,644)
XD6: JP1.7 U1.130 U2.42 U3.15 | length 8148.9
  Top Layer w10: JP1.7@-2325,-579.88 -2266.52,-521.4 -2266.52,-407.14 -2107.32,-247.94 -2107.32,222.68 -1977.94,352.06 -1880,352.06 -1405,827.06 v1@-1405,860 ; v1(-1411,860) v1@-1405,860 ; v1(-1405,1774.73) v1@-1405,860 ; U2.42@-232.44,1672.44 -198,1706.87 -198,1743.13 -210,1755.13 v1(-210,1785) ; v1(68.11,514.89) U1.130@116.61,563.39 ; v1(1087,1707) 1116,1678 ; v1(1116,1744) 1116,1678 ; 1116,1678 1135,1659 1135,1415.91 U3.15@1090.26,1371.17 1090.26,1387 1106,1387 1116,1397 1116,1678
  Bottom Layer w10: v1(-1411,860) -1422,849 -1422,807 -1338,723 -140,723 v1(68.11,514.89) ; v1(-1405,1774.73) -1395.27,1784.46 v1@-210.54,1784.46 ; v1(-210,1785) 885,1785 887.93,1782.07 926,1744 930,1744 ; v1(1087,1707) 967,1707 930,1744 ; v1(1116,1744) 930,1744
XD7: JP1.8 U1.129 U2.44 | length 6352.9
  Top Layer w10: v1(-2284,-299) -2256,-299 -2160,-203 -2160,309.17 -1956,513.17 -1956,1519 -1604,1871 -1445.61,1871 -1440.61,1866 -1413.87,1866 v1(-1411.61,1863.74) ; U2.44@-260.28,1700.28 -240.25,1720.31 -240.25,1725.09 -237.98,1727.36 -237.98,1752.62 -240,1754.64 -240,1770 -246.56,1776.56 -246.56,1811.56 v1(-250,1815) ; U1.129@130.53,549.47 134.46,549.47 209.99,625 306.14,625 309.07,627.93 312,630.86 312,654.14 317.86,660 335.36,660 350,674.64 350,695.36 341,704.36 341,1031.63 314.97,1057.65 314.97,1061.79 314.97,1063.74 ccw(c265,1085) 312,1112.21 312,1232.79 ccw(c265,1260) 314.08,1283.24 310.16,1776 v1(310.05,1810)
  Bottom Layer w10: JP1.8@-2403.74,-579.88 -2380,-579.88 -2380,-557 -2364,-541 -2364,-321 -2348,-305 -2290,-305 v1(-2284,-299) ; v1(-1411.61,1863.74) -1408.17,1860.3 -1384.91,1860.3 -1377.61,1853 -288,1853 v1(-250,1815) -246.56,1818.44 -232.07,1818.44 v1(310.05,1810)
XD8: JP1.9 U1.128 U2.30 U3.29 | length 8018.6
  Top Layer w10: U2.30@-65.4,1505.4 -45.49,1525.32 240.02,1810.82 299.7,1835 320.41,1835 364.81,1815 369,1815 ; U1.128@144.45,535.55 144.45,536.83 216.62,609 328,609 369,650 369,1815 ; v1(607.75,-619) 786.8,-439.96 786.8,122.2 644,265 644,785 651,792 651,987.61 708.39,1045 ; U3.29@742.27,1067.73 731.12,1067.73 708.39,1045 ; 369,1815 502,1816.79 506.21,1816.79 509.14,1813.86 558,1765 558,1060 573,1045 708.39,1045
  Bottom Layer w10: JP1.9@-2325,-501.14 -2218.42,-607.72 -892.14,-607.72 -883.22,-598.8 -572.95,-598.8 -563.16,-589.01 -96.76,-589.01 -6.76,-499 185.96,-499 283.8,-596.84 472.21,-596.84 494.37,-619 v1(607.75,-619)
XD9: JP1.10 U1.127 U2.32 U3.30 | length 9551.5
  Top Layer w10: v1(-2920,-395) -2920,2060 v1(-2915,2065) ; U2.32@-93.24,1533.24 -73.21,1553.27 -73.21,1558.06 -52.55,1578.72 -52.55,1642.45 135,1830 135,1840 v1@143,1848 ; v1(135,1856) v1@143,1848 ; U1.127@158.37,521.63 158.37,525.56 225.81,593 371,593 394,616 394,803 433,842 v1(433,1008) ; v1(390,2115) 386.56,2111.56 386.56,2091.56 v1@143,1848 ; v1@620.67,1839.19 v1(625,1835) ; v1@623.5,1833.5 635.07,1821.93 638,1819 640.93,1250.19 786.17,1104.94 786.17,1079.63 764.54,1058 U3.30@764.54,1045.46 764.54,1033.54 739,1008 v1(713,1008)
  Bottom Layer w10: v1@-2916.56,-398.44 -2800.06,-514.94 -2429.33,-514.94 -2415.52,-501.14 JP1.10@-2403.74,-501.14 ; v1(-2915,2065) -2865,2115 v1(390,2115) ; v1(135,1856) 607.76,1847.77 611.8,1847.77 614.71,1844.96 v1(625,1835) ; v1(433,1008) v1(713,1008)
XD10: JP1.11 U1.124 U2.34 U3.31 | length 7948.5
  Top Layer w10: JP1.11@-2325,-422.4 -2123.32,-220.72 -2123.32,279.99 -2030.74,372.57 -1925.48,372.57 -1615,683.04 -1615,1171 -1495,1291 v1(-1495,1812) ; v1(-125,2000) -125,1813.11 -70.94,1759.06 ; U2.34@-121.08,1561.08 -102.81,1579.35 -68.55,1613.61 ; -70.94,1616 -70.94,1759.06 ; v1(164,424) 164,439.82 197.14,479.87 U1.124@200.13,479.87 ; v1(688.16,800) 688.16,840.84 675,854 675,911.37 U3.31@786.81,1023.19 786.81,1036 809,1058.19 809,1085.7 807.91,1086.79 807.91,1113.09 662,1259 662,2111 633,2140 310,2140 -70.94,1759.06
  Bottom Layer w10: v1(-1495,1812) -1492.34,1814.66 -1492.34,1841 -1317.34,2016 -145.86,2016 -129.86,2000 v1(-125,2000) ; v1(164,424) 150,438 150,602.4 134.78,617.62 134.78,743 157.4,765.62 268.16,765.62 312.78,721 460,721 473,734 622.16,734 v1(688.16,800)
XD11: JP1.12 U1.123 U2.36 U3.32 | length 7794.9
  Top Layer w10: v1(-2516,1749) -2610,1655 -2610,1327 -2515,1232 -2515,456 -2491,432 -2491,-25.13 -2476,-40.13 v1(-2476,-45) ; U2.36@-148.92,1588.92 -148.92,1593.7 -116,1626.62 v1(-116,1720) ; U1.123@214.05,465.95 249,500.9 v1(249,530) ; v1(700,1750) 700,1243.63 823.91,1119.72 823.91,1103.88 839.96,1087.83 839.96,1031.79 U3.32@809.09,1000.92 789.92,1000.92 747,958 v1(747,831)
  Bottom Layer w10: v1(-2516,1749) -753,1749 -733.54,1768.46 -685,1768.46 -659.54,1743 -401.71,1743 -398.1,1739.4 -137.62,1739.4 -118.22,1720 422,1720 441,1739 479.96,1739 490.96,1750 v1(700,1750) ; v1(-2476,-45) -2476,-350.14 JP1.12@-2403.74,-422.4 ; v1(249,530) 150.78,628.22 150.78,727 173.4,749.62 245.38,749.62 300,695 300,663 319,644 576,644 747,815 v1(747,831)
XD12: JP1.13 U1.122 U2.39 U3.35 | length 8157.8
  Top Layer w10: JP1.13@-2325,-343.66 -2272.66,-343.66 -2139.32,-210.32 -2139.32,299.68 -1910,529 -1910,1485 -1540,1855 -1493,1855 -1468,1830 -1405,1830 v1(-1285,1950) ; U2.39@-190.68,1630.68 -185.89,1630.68 -149,1667.57 -149,1834 -265,1950 -394,2079 -394,2119 -333,2180 626,2180 678,2128 678,1822 765,1735 765,1240.26 898,1107.26 898,971.36 875.9,949.26 U3.35@875.9,934.1 v1(810,868.2) ; U1.122@227.97,452.03 227.97,455.96 264.01,492 v1(278,492)
  Bottom Layer w10: v1(-1285,1950) -1255,1980 -300,1980 v1(-295,1975) ; v1(278,492) 278,556 166.78,667.22 166.78,711 189.4,733.62 228.16,733.62 250.78,711 250.78,689.22 331,609 566.8,609 810,852.2 v1(810,868.2)
XD13: JP1.14 U1.119 U2.41 U3.36 | length 12846.1
  Top Layer w10: v1(-2450,-1830) -2450,-1156.02 -2466,-1140.02 -2466,-405.92 JP1.14@-2403.74,-343.66 ; U2.41@-218.52,1658.52 -223.3,1658.52 -246,1635.82 -241,1630.82 -241,1594 -208,1561 -208,948 v1(-139,879) ; v1(252,329) 237,344 237,377.55 U1.119@269.73,410.27 ; v1(700,879) 716,879 722,873 722,815 731,806 792.34,806 ; v1(766,579) 766,779.66 792.34,806 ; v1(1020,-303) 958.39,-241.39 958.39,245.61 797,407 797,781.15 821.85,806 ; 792.34,806 863.77,877.43 ; 792.34,806 821.85,806 ; 821.85,806 863.77,847.92 ; 821.85,806 823,806 863.77,846.77 863.77,847.92 ; 863.77,847.92 872,856.15 U3.36@872,885.66 ; 863.77,847.92 863.77,877.43 ; 863.77,877.43 U3.36@872,885.66 ; 863.77,877.43 863.77,890.77 872,899 ; U3.36@872,885.66 872,899 ; U3.36@872,885.66 U3.36@898.17,911.83 884.83,911.83 872,899
  Bottom Layer w10: v1(-2450,-1830) -2450,-1951.14 -2421.14,-1980 -390.05,-1980 407.67,-1974.37 547.84,-1964.03 1273.92,-1856.08 1276.3,-1853.7 1385,-1745 1385,-986.57 1379.14,-980.72 1315.09,-980.72 1294,-959.63 1294,-929.8 1315.09,-908.72 1380.34,-908.72 1440,-968.37 1440,-1362.37 1450.86,-1373.23 1459.14,-1373.23 1465,-1367.37 1465,-604.52 1163.48,-303 v1(1020,-303) ; v1(-139,879) v1(700,879) ; v1(252,329) 422.97,329 465.91,371.94 465.91,432.91 512.49,479.49 666.49,479.49 v1(766,579)
XD14: JP1.15 U1.116 U2.43 U3.37 | length 6824.2
  Top Layer w10: JP1.15@-2325,-264.92 -2303.92,-264.92 -2181,-142 -2181,329 -1996,514 v1(-1996,1550) ; v1(-332.71,1587) -332.71,1600 U2.43@-246.36,1686.36 ; U1.116@311.48,368.52 311.48,372.44 353.92,414.88 353.92,456.16 416.77,519 416.77,573 v1(425.77,573) ; v1(881,1640) 876.13,1640 861.13,1655 834,1655 818,1639 818,1257.58 856.1,1219.47 863.1,1219.47 949,1133.57 949,933 920.44,904.44 U3.37@920.44,889.56 920.44,876.69 916.69,876.69 889,849 v1(889,815)
  Bottom Layer w10: v1(-1996,1550) -1264.06,1550 -1258.06,1556 -531,1556 -487,1600 v1@-332.71,1600 ; v1(-332.71,1587) -331.44,1588.27 -303.71,1588.27 -260.98,1631 857.51,1631 863.07,1636.56 877.56,1636.56 v1(881,1640) ; v1(425.77,573) 434.77,582 592.35,582 825.35,815 v1(889,815)
XD15: JP1.16 U1.115 U2.45 U3.38 | length 10934.2
  Top Layer w10: v1(-2490,-1790) -2490,-1648 -2491,-1647 -2491,-352.18 JP1.16@-2403.74,-264.92 ; v1(-347,1437) -374,1464 -374,1614.39 U2.45@-274.19,1714.19 ; U1.115@325.4,354.6 325.4,358.52 369.92,403.04 369.92,430.92 v1(442,503) ; v1(699,-1782) 703.87,-1782 719.41,-1766.46 727.4,-1766.46 733.26,-1760.6 793,-942.53 799.93,-775.07 845,-730 845,-607 1123,-329 1123,631 ; v1(865,1437) 848.32,1420.32 848.32,1254.68 867.53,1235.47 874.48,1235.47 965,1144.96 965,902 956,893 ; v1(908.5,587.5) 916,595 1087,595 1123,631 ; U3.38@942.71,867.29 942.71,879.71 956,893 ; 956,893 967.6,893 1085,893 1123,855 1123,631
  Bottom Layer w10: v1(-2490,-1790) -2345,-1790 -2260,-1875 515.83,-1875 608.83,-1782 v1(699,-1782) ; v1(-347,1437) -337.52,1427.52 770.54,1427.52 780.01,1437 v1(865,1437) ; v1(442,503) 600,503 701,604 786,604 802.5,587.5 v1(908.5,587.5)
pads on no net: +5V.K C31.1 C31.2 C32.1 C32.2 C34.2 C35.1 C35.2 C36.1 C36.2 C37.1 C37.2 C39.1 C39.2 C40.1 C40.2 J5.2 JTAG1.6 OSC2.0 POWER.1 POWER.2 R3.1 R5.2 R9.1 R10.1 R23.1 R25.1 RESET.3 RESET.4 U1.81 U1.82 U2.9 U2.10 U2.12 U2.13 U2.14 U2.15 U2.25 U2.26 U2.28 U2.38 U2.47 U2.48 U3.6 U3.13 U3.14 U3.16 U3.17 U3.23 U3.24 U3.25 U3.26 U3.27 U3.28 U3.34 U3.41 U3.42 U4.1 U4.3 U4.5 U4.7 U4.8 U5.7 U5.14 U6.6 U6.7 U6.8 U6.10 U6.11 U6.12 U6.14 U7.14 U7.29 U9.5 U9.6 U9.8 U10.7
copper on no net: | length 871.6
  Top Layer w10: -763.85,-223.85 -575,-35 -445,-35 -360,50 -5.7,50

## Silkscreen, mask and mechanical layers (free items; w line width, h text height)
Mechanical 1:
  lines w10: 2560,1990 2560,1985 ; 2560,1985 2560,1995 2560,2225 -3270,2225 -3270,-2315 2560,-2315 2560,1985